# Altium PCB buck3.PcbDoc
Units mil, origin at the board's own origin, x right, y up, seen from the top; angles counter-clockwise.
Board outline 1968.5 x 984.25 mil, 4 copper layers (Top Layer, Signal Layer 1, Signal Layer 2, Bottom Layer), stack 61.811 mil thick; 31 components, 21 nets, 104 pads, 114 vias.
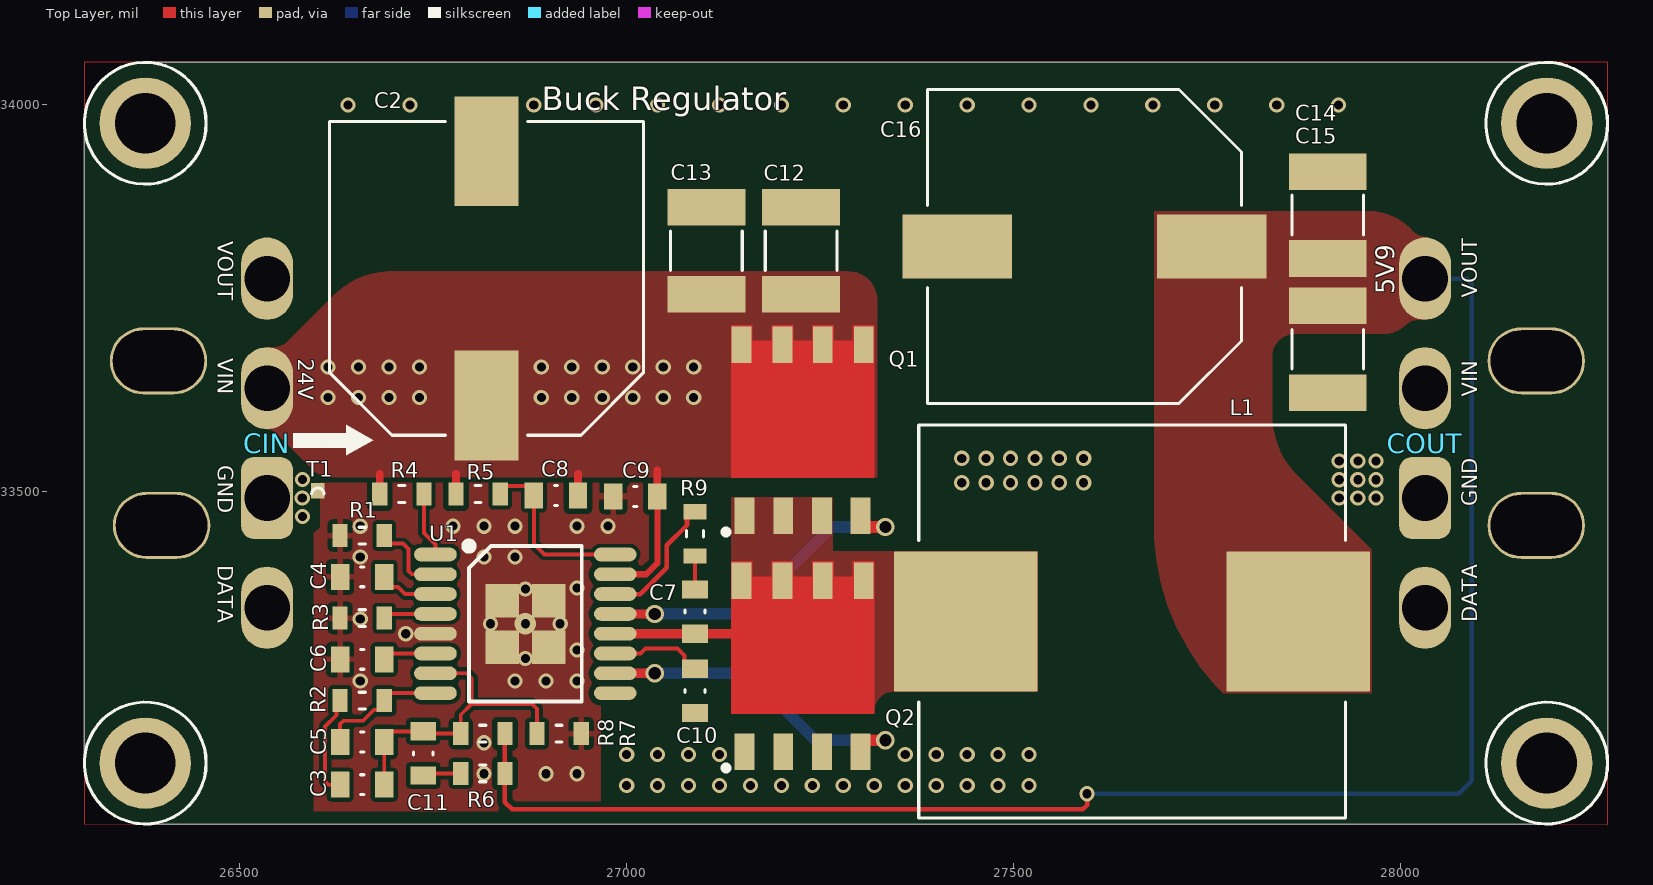
[diagram p0: Top Layer view]
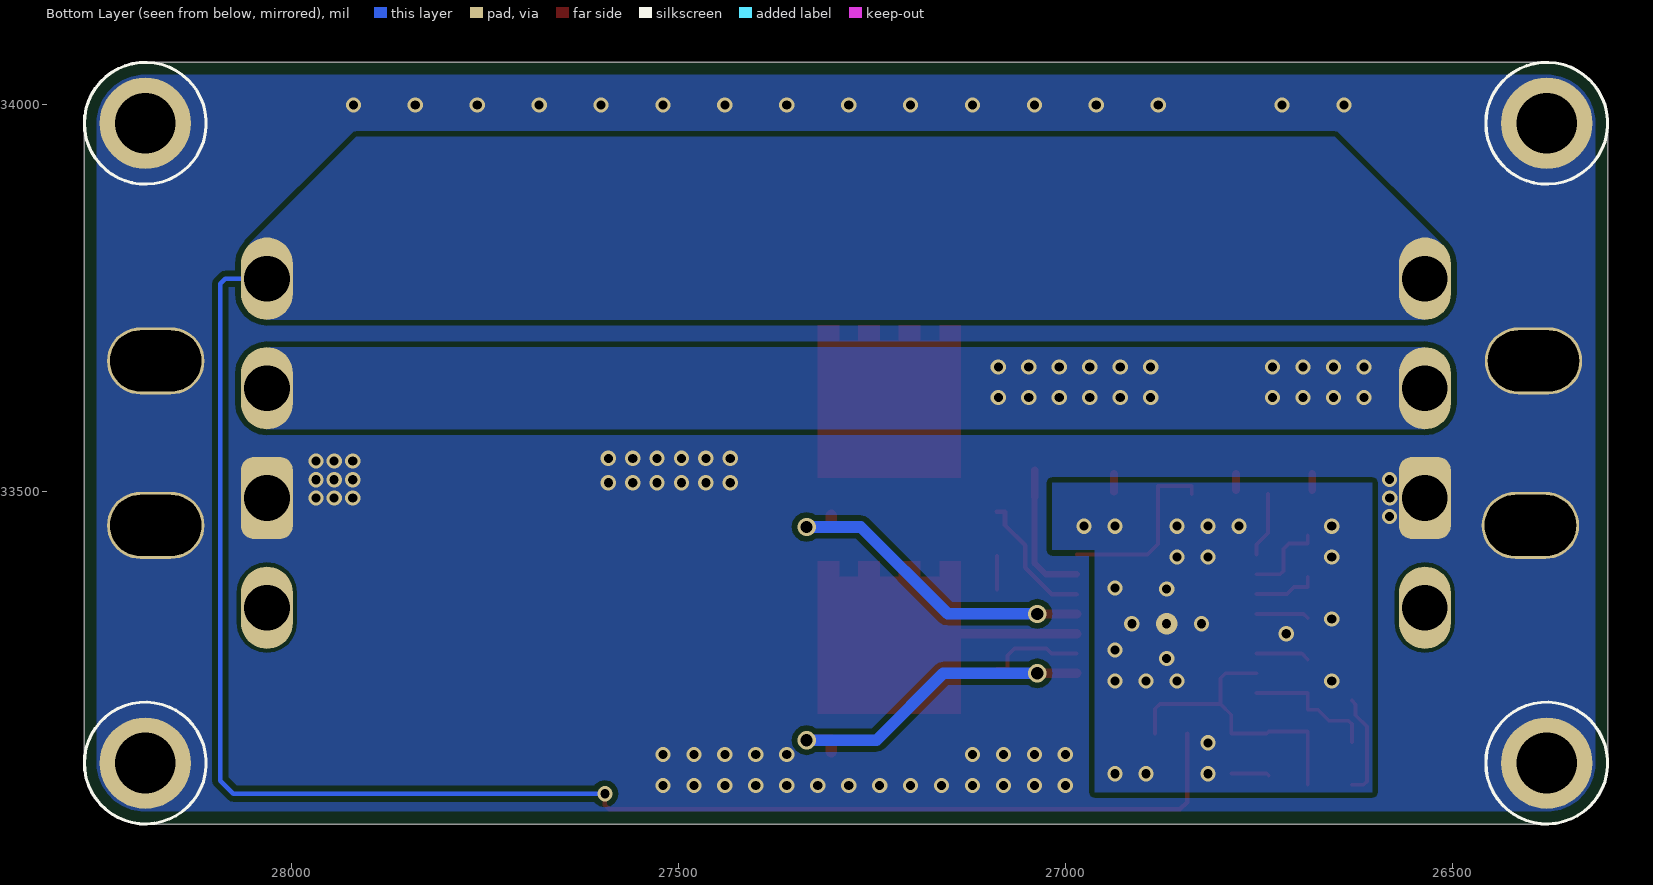
[diagram p1: Bottom Layer view, seen from below]
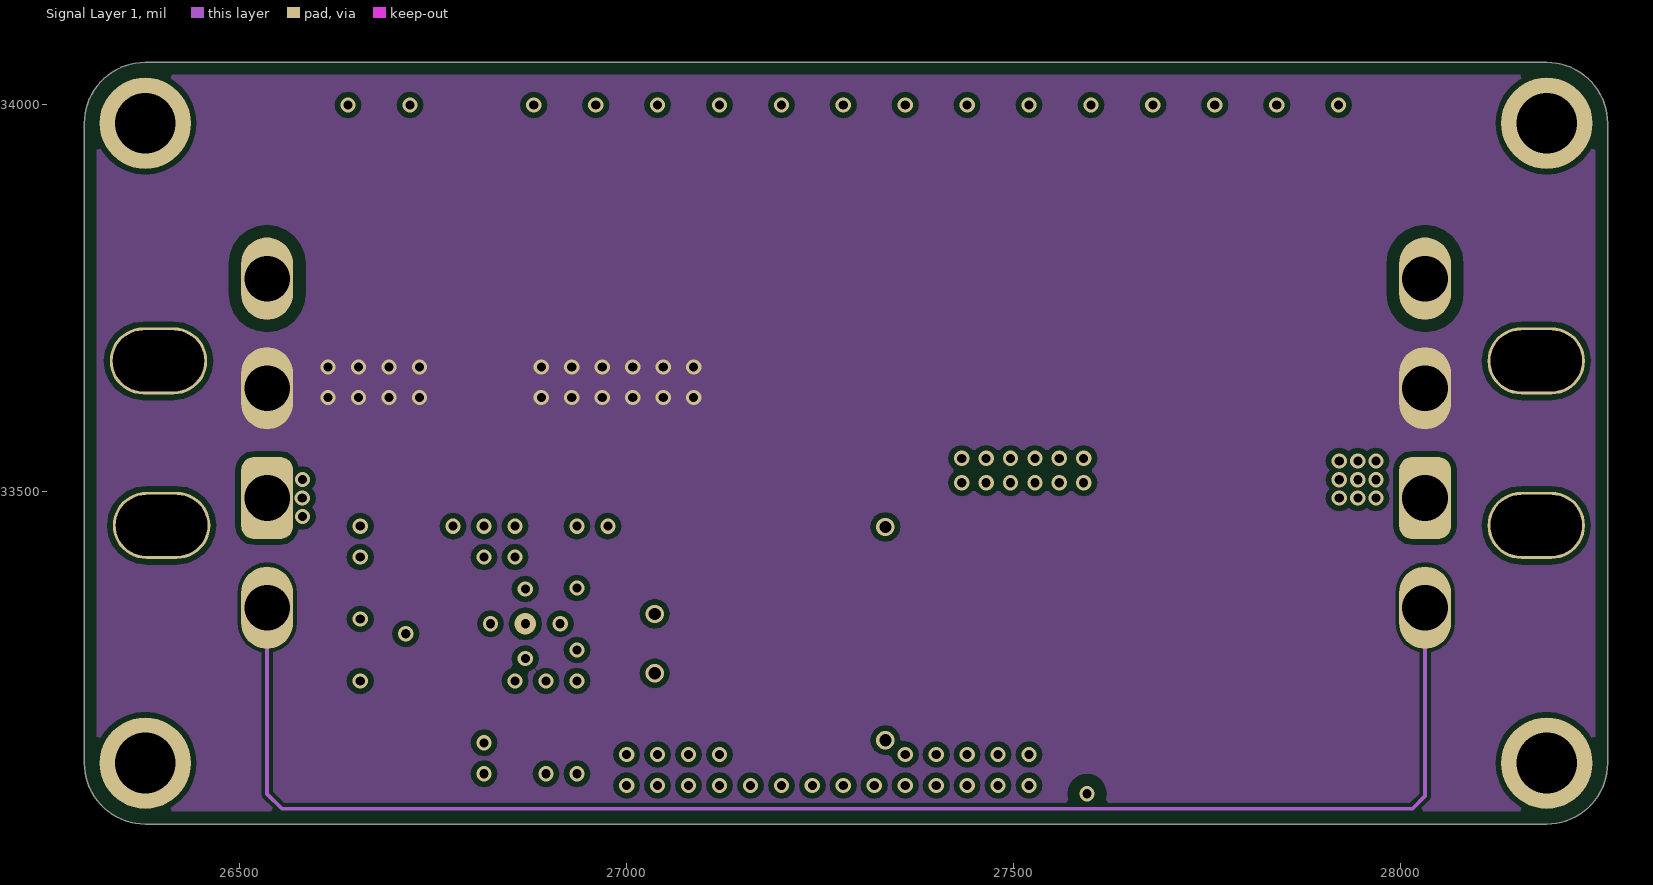
[diagram p2: Signal Layer 1]
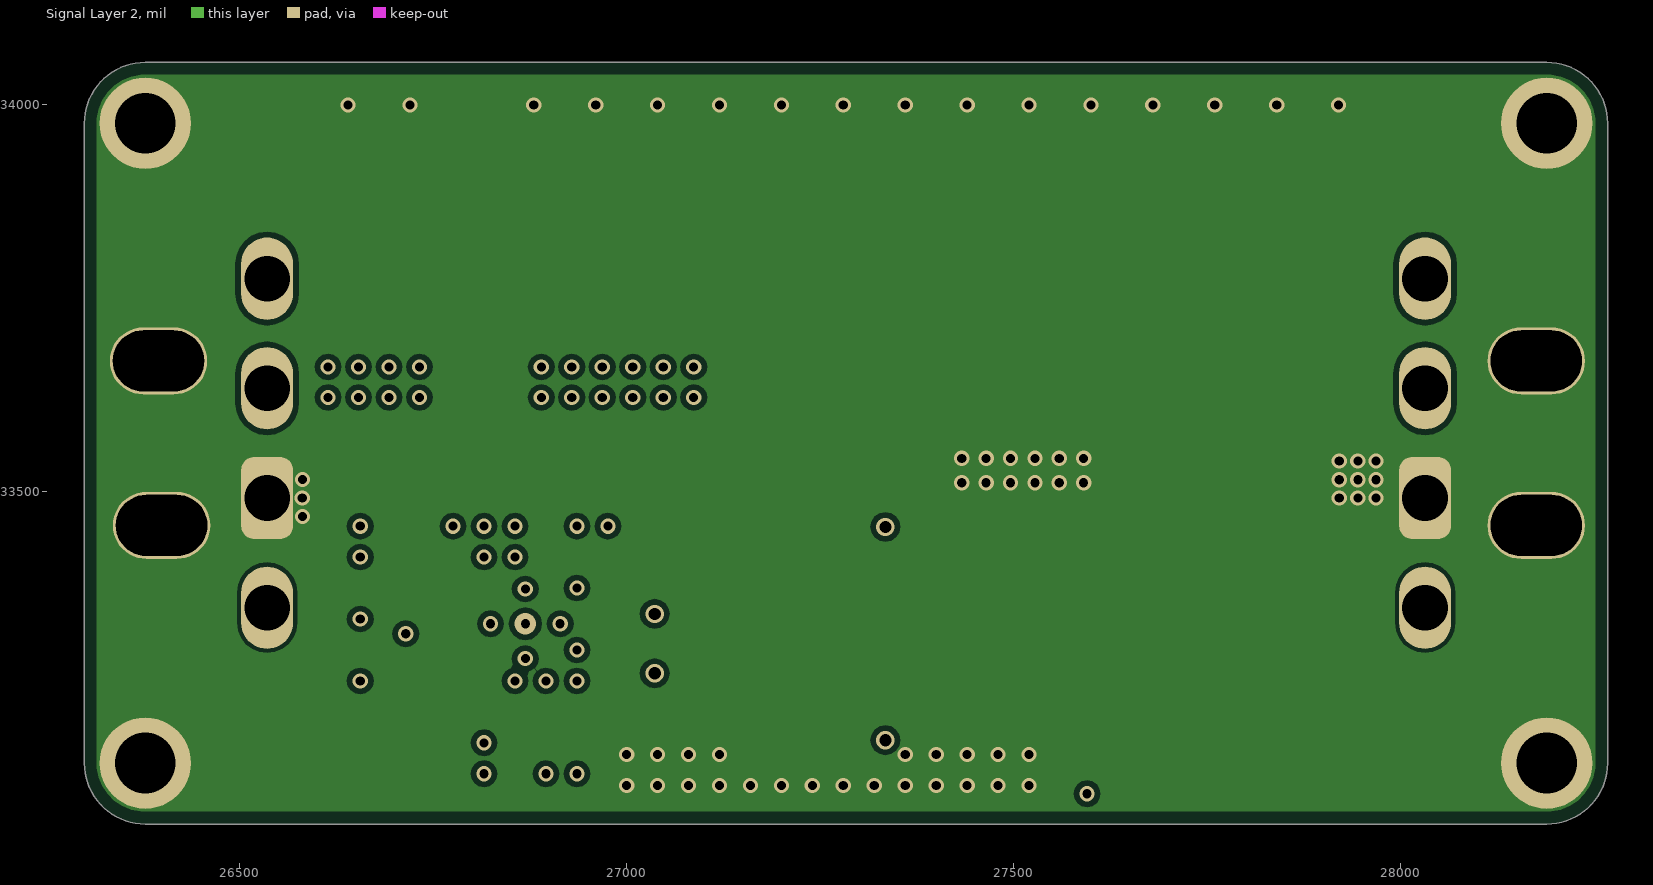
[diagram p3: Signal Layer 2]
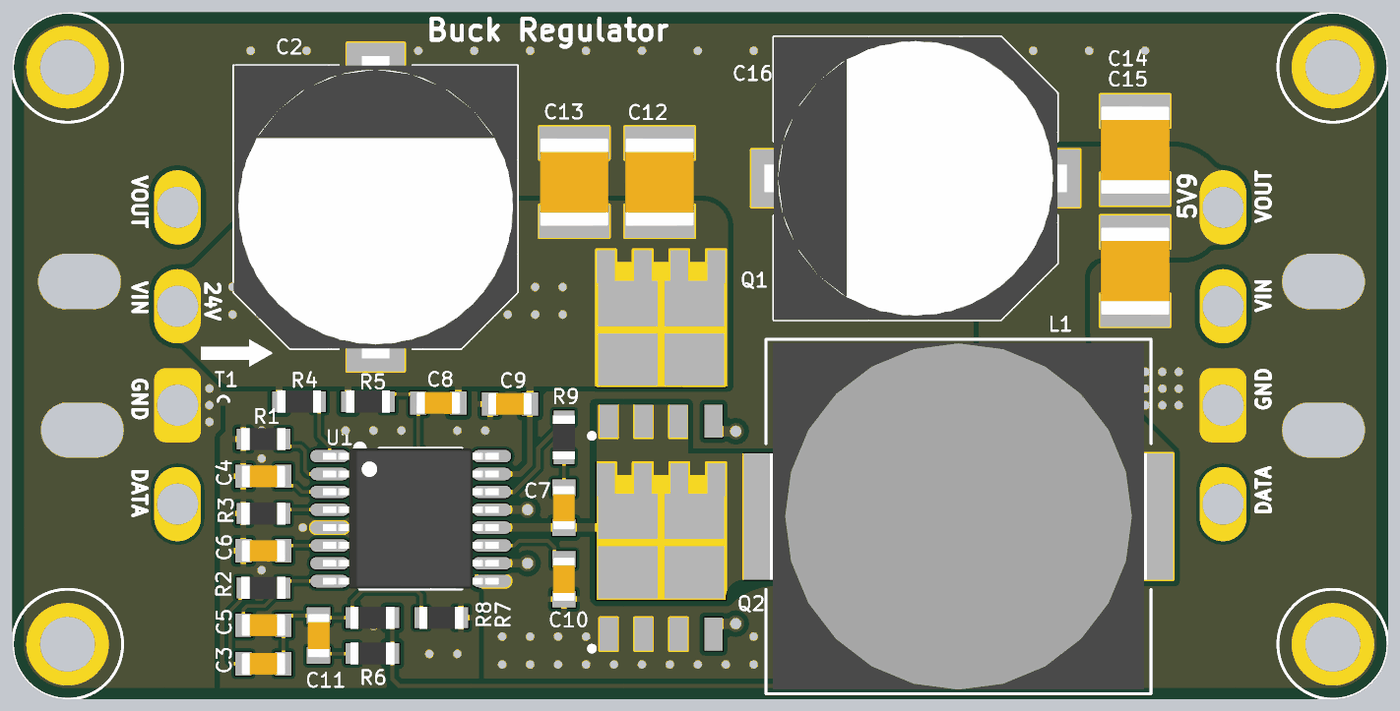
[diagram p4: 3D render of the assembled board from above, using the file's embedded part models]

## Layer stack, top to bottom
Top Solder: solder mask 0.4921, Solder Resist, Dk 3.5
Top Layer: signal copper 1.378
Dielectric Top: core 3.937, FR-4, Dk 4.05
Signal Layer 1: signal copper 0.689
Dielectric MIddle: prepreg 49.8031, FR-4, Dk 4.8
Signal Layer 2: signal copper 0.689
Dielectric Bottom: core 3.937, FR-4, Dk 4.05
Bottom Layer: signal copper 1.378
Bottom Solder: solder mask 0.4921, Solder Resist, Dk 3.5

## Board outline
26299.21,33149.61 26299.21,33976.38 cw(c26377.95,33976.38) 26377.95,34055.12 28188.98,34055.12 cw(c28188.98,33976.38) 28267.72,33976.38 28267.72,33149.61 cw(c28188.98,33149.61) 28188.98,33070.87 26377.95,33070.87 cw(c26377.95,33149.61)

## Design rules (kind name [scope] priority, off if disabled: settings)
AssemblyTestPointUsage [All] p1: valid=2
AssemblyTestpoint [All] p1: testpointundercomponent=TRUE minsize=1 maxsize=1000 preferedsize=60 minholesize=0 maxholesize=1000 preferedholesize=32 testpointgrid=1 usegrid=FALSE gridtolerance=0.01 allowsidetop=TRUE allowsidebottom=TRUE
BoardOutlineClearance BoardOutlineClearance_SILK [OnLayer('Top Overlay') or OnLayer('Bottom Overlay')] p1: gap=0 ignorepadtopadclearanceinfootprint=FALSE
BoardOutlineClearance [All] p2: gap=16 ignorepadtopadclearanceinfootprint=FALSE
Clearance Clearance_GND_TIE [InComponentClass('gnd_ties')] p1: gap=0 ignorepadtopadclearanceinfootprint=FALSE
Clearance "Stitching GND" [IsStitchingVia and InNet('GND') vs (IsVia and (Not IsStitchingVia)) Or IsPad] p2: gap=5 ignorepadtopadclearanceinfootprint=FALSE except(0: Arc-Hole Track-Hole SMDPad-Hole THPad-Hole Via-Hole Fill-Hole Poly-Hole Region-Hole Text-Hole)
Clearance "Stitching SGND" [IsStitchingVia and InNet('SGND') vs (IsVia and (Not IsStitchingVia)) Or IsPad] p3: gap=5 ignorepadtopadclearanceinfootprint=FALSE except(0: Arc-Hole Track-Hole SMDPad-Hole THPad-Hole Via-Hole Fill-Hole Poly-Hole Region-Hole Text-Hole)
Clearance Clearance_VOUT_24V [InNet('24V') Or InNet('VOUT') vs InNet('24V') Or InNet('VOUT')] p4: gap=15.75 ignorepadtopadclearanceinfootprint=FALSE except(0: Arc-Hole Track-Hole SMDPad-Hole THPad-Hole Via-Hole Fill-Hole Poly-Hole Region-Hole Text-Hole)
Clearance Clearance_VCC_GND [InNet('SW') Or InNet('24V') Or InNet('VOUT') Or InNet('?DRV') Or InNet('GND') Or InNet('SGND') vs InNet('SW') Or InNet('GND') Or InNet('SGND') Or InNet('24V') Or InNet('VOUT') Or InNet('?DRV')] p5: gap=7.09 ignorepadtopadclearanceinfootprint=FALSE except(0: Arc-Hole Track-Hole SMDPad-Hole THPad-Hole Via-Hole Fill-Hole Poly-Hole Region-Hole Text-Hole)
Clearance Clearance_DRV_SW [InNet('HDRV') Or InNet('LDRV') Or InNet('SW') vs InNet('HDRV') Or InNet('LDRV') Or InNet('SW')] p6: gap=10 ignorepadtopadclearanceinfootprint=FALSE except(0: Arc-Hole Track-Hole SMDPad-Hole THPad-Hole Via-Hole Fill-Hole Poly-Hole Region-Hole Text-Hole; 5: Arc-SMDPad Arc-THPad Track-SMDPad Track-THPad Track-Via SMDPad-SMDPad SMDPad-THPad SMDPad-Via SMDPad-Fill SMDPad-Poly SMDPad-Region SMDPad-Text THPad-THPad THPad-Via THPad-Fill THPad-Poly THPad-Region THPad-Text)
Clearance [All] p7: gap=5 ignorepadtopadclearanceinfootprint=FALSE except(0: Arc-Hole Track-Hole SMDPad-Hole THPad-Hole Via-Hole Fill-Hole Poly-Hole Region-Hole Text-Hole)
ComponentClearance [All] p1: gap=10 collisioncheckmode=3 verticalgap=100000 showdistances=FALSE
FabricationTestPointUsage [All] p1: valid=2 allowmultiple=FALSE
FabricationTestpoint [All] p1: side=3 testpointundercomponent=TRUE minsize=1 maxsize=1000 preferedsize=60 minholesize=0 maxholesize=1000 preferedholesize=32 testpointgrid=1 allowsidetop=TRUE allowsidebottom=TRUE usegrid=FALSE gridtolerance=0.01
HoleSize [All] p1: absolutevalues=TRUE maxlimit=118.11 minlimit=11.81 maxpercent=80.000 minpercent=20.000
MinimumAnnularRing [All] p1: minimumring=3
MinimumSolderMaskSliver [All] p1: minsoldermaskwidth=2
PlaneClearance [All] p1: clearance=10
PlaneConnect [All] p1: planeconnectstyle=Direct reliefexpansion=20 reliefentries=4 reliefconductorwidth=10 reliefairgap=10
PolygonConnect PolygonConnect_GND_STITCH [All vs (PadViaLibraryTemplate='GND_STITCH') Or InComponentClass('caps') Or InPadClass('mount_pads') Or IsTestpoint Or (IsVia and InComponent('U1'))] p1: connectstyle=Direct reliefconductorwidth=10 reliefentries=4 polygonreliefangle="90 Angle" airgapwidth=10
PolygonConnect PolygonConnect_GND_TIE [InComponentClass('gnd_ties')] p2: connectstyle=Direct reliefconductorwidth=8 reliefentries=4 polygonreliefangle="90 Angle" airgapwidth=6
PolygonConnect [All] p3: connectstyle=Relief reliefconductorwidth=8 reliefentries=4 polygonreliefangle="90 Angle" airgapwidth=6
RoutingVias [All] p1: holewidth=11.81 width=19.68 viastyle="Through Hole" minholewidth=11.81 minwidth=19.68 maxholewidth=39.37 maxwidth=39.37 viatemplateguid#1={BAA0EB76-4A78-4CE7-A276-326FA7DB2DC2} viatemplateguid#2={94253A7A-6B9A-4D54-9AA5-C9B8767EAE1F} viatemplateguid#3={C367774C-4605-47A4-9AB2-15C955A3533B} viatemplateguid#4={F74689E1-A418-4912-85DE-EF69A89A6256} viatemplateguid#5={CFB45FA9-C63B-4574-8658-0FA445F6A7ED} viatemplateguid#6={6DAC4434-ACAF-4762-9C78-70CE4687DF30} viatemplatename#1=GND_STITCH viatemplatename#2=v50h30m0mx0 viatemplatename#3=v60h40m0mx0 viatemplatename#4=v70h30m0mx0 viatemplatename#5=v50h30mx0 viatemplatename#6=v100h30m0mx0
ShortCircuit [InComponentClass('gnd_ties')] p1: allowed=TRUE
SilkToSilkClearance [All] p1: silktosilkclearance=0
SilkToSolderMaskClearance [IsPad] p1: minsilkscreentomaskgap=0 clearancetoexposedcopper=TRUE
SolderMaskExpansion [All] p1: expansion=2 istentingtop=FALSE
Width [All] p1: maxlimit=50 minlimit=5 preferedwidth=5 minimp=50.000000 maximp=50.000000 favimp=50.000000
18 further rules are at their usual default settings.

## Classes and differential pairs
component class caps: C2 C12 C13 C14 C15 C16 CIN COUT L1 Q1 Q2
pad class mount_pads: Free-1 Free-TL U1-5 U1-9 U1-17
component class gnd_ties: T1

## Components (designator, comment, footprint, x,y, rotation, side; value= is the part's Value field where it differs from the comment)
C2 "470uF" CAPAE110103X125L 26818.9,33776 r270 top
C3 "220pF" "CAPC 0603 1608X05L" 26658.3,33121.66 r0 top
C4 "100nF" "CAPC 0603 1608X05L" 26658.3,33390.21 r0 top
C5 "12pF" "CAPC 0603 1608X05L" 26658.3,33176.94 r0 top
C6 "3.3nF" "CAPC 0603 1608X05L" 26658.3,33283.58 r0 top
C7 "100nF" "CAPC 0603 1608X05L" 27088.44,33345.32 r90 top
C8 "100pF" "CAPC 0603 1608X05L" 26908.62,33495.29 r0 top
C9 "1uF" "CAPC 0603 1608X05L" 27011.15,33494 r0 top
C10 "1uF" "CAPC 0603 1608X05L" 27088.44,33242.79 r90 top
C11 "120pF" "CAPC 0603 1608X05L" 26737.21,33162.08 r90 top
C12 "22uF" "CAPC 1210" 27225.39,33811.75 r270 top
C13 "22uF" "CAPC 1210" 27103.18,33811.75 r270 top
C14 "22uF" "CAPC 1210" 27905.94,33857.74 r270 top
C15 "22uF" "CAPC 1210" 27905.94,33684.29 r90 top
C16 "220uF" CAPAE110103X125L 27591.76,33817.16 r0 top
CIN "CON2" CON2 26535.43,33562.99 r270 top
COUT "CON2" CON2 28031.77,33562.99 r270 top
L1 "Inductor" INDP135126X40L 27653.1,33332.68 r0 top
Q1 "Infineon BSC093N04LSGATMA1" INF-PG-TDSON-8-1_V 27227.39,33580.25 r90 top
Q2 "Infineon BSC093N04LSGATMA1" INF-PG-TDSON-8-1_V 27227.39,33275.28 r90 top
R1 "100K" "RESC 0603 1608X05L" 26658.3,33443.53 r0 top
R2 "64.9k" "RESC 0603 1608X05L" 26658.3,33230.26 r0 top
R3 "1K" "RESC 0603 1608X05L" 26658.3,33336.89 r0 top
R4 "57.6K" "RESC 0603 1608X05L" 26709.47,33497.26 r0 top
R5 "3.3k" "RESC 0603 1608X05L" 26808.06,33497.26 r0 top
R6 "5.9k" "RESC 0603 1608X05L" 26814.14,33136.32 r0 top
R7 "16K" "RESC 0603 1608X05L" 26912.74,33187.67 r180 top
R8 "110K" "RESC 0603 1608X05L" 26814.14,33187.67 r0 top
R9 "2r0" "RESC 0603 1608X05L" 27088.44,33445.88 r270 top
T1 "GND_TIE" GND_TIE 26600.89,33501.57 r180 top net-tie
U1 "TPS40057" TSOP65P640X120_HS-17N 26869.09,33329.57 r270 top

## Footprints (in the part's own frame and the unit in brackets; to place one, negate y for a bottom-side part, rotate by r counter-clockwise, add the part's x,y. Pads: shape width x height; smd on the part's side, far side on the other; paste and mask are expansions set on the pad)
CAPAE110103X125L [mm] "Aluminum Electrolytic Capacitor, Body 10.30x10.30x12.50mm, IPC High Density"
  rrect1% 3.6x2.1 smd: 1(4.175,0) 2(-4.175,0)
  silkscreen extent -5.15,-5.15 5.15,5.15, body extent -5.5,-5.15 5.5,5.15, height 12.5
"CAPC 0603 1608X05L" [mm]
  rrect1% 0.6x0.85 smd: 1(-0.725,0) 2(0.725,0)
  silkscreen extent -0.05,-0.33 0.05,0.33, body extent -0.8,-0.4 0.8,0.4, height 0.45
"CAPC 1210" [mm] "1210"
  rrect1% 1.2x2.55 smd: 1(-1.425,0) 2(1.425,0)
  silkscreen extent -0.65,-1.17 0.65,1.18, body extent -1.6,-1.25 1.6,1.25, height 1.7
CON2 [mm]
  oval 2.7x1.7 hole 1.5 paste+0 mask+0: 1(-5.4,0) 2(-1.8,0) 4(5.4,0)
  rrect50% 2.7x1.7 hole 1.5 paste+0 mask+0: 3(1.8,0)
GND_TIE [mil]
  rrect1% 10x20 smd paste-787.4 mask+0: 1(-3.94,0)
  rrect1% 10x20 smd paste-787.4 mask+2: 2(3.94,0)
INDP135126X40L [mm] "Precision Wire Wound Inductor, 2-Leads, Body 13.50x12.60mm, IPC High Density"
  rrect1% 4.7x4.6 smd: 1(-5.458,0) 2(5.458,0)
  silkscreen extent -7,-6.45 7,6.45, body extent -6.85,-6.3 6.85,6.3, height 4.1
INF-PG-TDSON-8-1_V [mm]
  rrect1% 1.2x0.65 smd: 1(-2.825,1.905) 2(-2.825,0.635) 3(-2.825,-0.635) 4(-2.825,-1.905) 5(2.794,-2.007) 6(2.794,-0.66) 7(2.794,0.66) 8(2.794,2.007)
  Top Layer region: 2.925,-0.315 2.925,-1.015 3.425,-1.015 3.425,-0.315
  Top Layer region: 2.925,1.015 2.925,0.315 3.425,0.315 3.425,1.015
  Top Layer region: 2.925,-1.65 2.925,-2.35 3.425,-2.35 3.425,-1.65
  Top Layer region: 2.925,2.35 2.925,1.65 3.425,1.65 3.425,2.35
  Top Layer region: 2.925,2.35 -1.575,2.35 -1.575,-2.35 2.925,-2.35
  silkscreen extent -3.4,2.46 -3.3,2.57, body extent -3.08,-2.58 3.08,2.58, height 1
"RESC 0603 1608X05L" [mm]
  rrect1% 0.5x0.75 smd: 1(-0.725,0) 2(0.725,0)
  silkscreen extent -0.1,-0.28 0.1,0.28, body extent -0.8,-0.4 0.8,0.4, height 0.45
TSOP65P640X120_HS-17N [mm]
  oval 0.45x1.4 smd: 1(-2.275,-2.95) 2(-1.625,-2.95) 3(-0.975,-2.95) 4(-0.325,-2.95) 5(0.325,-2.95) 6(0.975,-2.95) 7(1.625,-2.95) 8(2.275,-2.95) 9(2.275,2.95) 10(1.625,2.95) 11(0.975,2.95) 12(0.325,2.95) 13(-0.325,2.95) 14(-0.975,2.95) 15(-1.625,2.95) 16(-2.275,2.95)
  rrect1% 1.1x1.1 smd paste+0 mask+0: 17(-0.762,0.762) 17(-0.762,-0.762) 17(0.762,0.762) 17(0.762,-0.762)
  silkscreen extent -2.67,-1.97 2.55,1.85, body extent -2.55,-3.2 2.55,3.2, height 1.2

## Part data
C2 C16: library part "E CAP", "Capacitor"
C3 C4 C5 C6 C7 C8 C9 C10 C11 C12 C13 C14 C15: library part Cap, "Capacitor"
Q1 Q2: library part MOSFET-N, "N Channel MOSFET"
R1 R2 R3 R4 R5 R6 R7 R8 R9: library part Res2, "Resistor"
U1: "Buck Controller"

## Free pads (board coordinates)
  oval 125.98x86.61 hole 78.74 slot 118.11 at 0 deg mask+0: 1(26395.06,33669.29) 1(26399.06,33456.69) 1(28175.44,33456.69) 1(28175.44,33669.29)
  round 118.11 hole 78.74 paste+0 mask+0: TL(26377.95,33976.38) TL(26377.95,33149.61) TL(28188.98,33976.38) TL(28188.98,33149.61)

## Via types
v1: diameter 19.68, hole 11.81, Top Layer to Bottom Layer, tented both sides, 109 vias
v2: diameter 23.62, hole 15.75, Top Layer to Bottom Layer, tented both sides, 4 vias
v3: diameter 27.56, hole 11.81, Top Layer to Bottom Layer, tented both sides, 1 vias

## Nets (pads, with @x,y where several pads share a name; then routed paths per layer and width w, separated by ;. In a path a pad name is that pad's centre, name@x,y a point inside that pad or via, vN(x,y) a via of type N, cw(c..) or ccw(c..) an arc to the next point about the centre after c; other vN are vias at no path point)
24V: C2.1 C8.2 C9.2 C12.2 C13.2 CIN.2 COUT.2 Q1.5 Q1.6 Q1.7 Q1.8 R4.1 R5.1 U1.15 | length 246.4
  Top Layer w8: U1.15 27025.44,33393.55 27039.7,33407.81 C9.2
  Top Layer w10: R4.1@26680.93,33502.18 26680.93,33523.62 ; R5.1@26779.52,33502.18 26779.52,33523.62 ; C8.2@26937.17,33500.21 26937.17,33523.62 ; C9.2 27039.7,33527.56
  other v1: 26614.19,33622.07 26653.56,33622.07 26692.93,33622.07 26732.3,33622.07 26889.78,33622.07 26929.15,33622.07 26968.52,33622.07 27007.89,33622.07 27047.26,33622.07 27086.63,33622.07 26614.19,33661.44 26653.56,33661.44 26692.93,33661.44 26732.3,33661.44 26889.78,33661.44 26929.15,33661.44 26968.52,33661.44 27007.89,33661.44 27047.26,33661.44 27086.63,33661.44
DATA: CIN.4 COUT.4 | length 1995.2
  Signal Layer 1 w5: CIN.4 26535.43,33109.57 26554.45,33090.55 28015.28,33090.55 28031.77,33107.04 COUT.4
FB: C3.2 C5.2 C11.2 R7.2 R8.1 U1.7 | length 415
  Top Layer w5: C3.2 C5.2 26686.84,33190.62 C11.2 26740.16,33187.67 R8.1 26785.6,33212.04 26799.7,33226.14 ; U1.7 26793.31,33265.59 26799.7,33259.2 26799.7,33226.14 ; R7.2 26884.19,33219.87 26877.92,33226.14 26799.7,33226.14
GND: C2.2 C10.1 C12.1 C13.1 C14.1 C15.1 C16.2 CIN.3 COUT.3 pad.1 pad.TL Q2.1 Q2.2 Q2.3 T1.2 U1.9
  other v1: 27000,33120.63 27040,33120.63 27080,33120.63 27120,33120.63 27160,33120.63 27200,33120.63 27240,33120.63 27280,33120.63 27320,33120.63 27360,33120.63 27400,33120.63 27440,33120.63 27480,33120.63 27520,33120.63 27000,33160.63 27040,33160.63 27080,33160.63 27120,33160.63 27360,33160.63 27400,33160.63 27440,33160.63 27480,33160.63 27520,33160.63 26581,33468.19 26580.88,33492.13 27920.9,33492.07 27944.88,33492.07 27968.23,33492.07 27433.1,33511.85 27464.6,33511.85 27496.1,33511.85 27527.59,33511.85 27559.09,33511.85 27590.58,33511.85 26581,33516 27920.9,33515.75 27944.88,33515.75 27968.23,33515.75 27920.9,33539.95 27944.88,33539.95 27968.23,33539.95 27433.1,33543.35 27464.6,33543.35 27496.1,33543.35 27527.59,33543.35 27559.09,33543.35 27590.58,33543.35 26640,34000 26720,34000 26880,34000 26960,34000 27040,34000 27120,34000 27200,34000 27280,34000 27360,34000 27440,34000 27520,34000 27600,34000 27680,34000 27760,34000 27840,34000 27920,34000
HDRV: Q1.4 U1.13 | length 442.6
  Top Layer w12: U1.13@26985.09,33342.37 U1.13 v2(27036.28,33342.37)
  Top Layer w15: Q1.4@27302.39,33469.58 Q1.4 27302.39,33454.72 v2(27334.33,33454.72)
  Bottom Layer w15: v2(27036.28,33342.37) 27152.17,33342.37 27264.53,33454.72 v2(27334.33,33454.72)
LDRV: Q2.4 U1.10 | length 431.9
  Top Layer w12: U1.10 v2(27036.28,33265.59)
  Top Layer w15: Q2.4 27302.39,33179.13 v2(27334.33,33179.13)
  Bottom Layer w15: v2(27036.28,33265.59) 27157.63,33265.59 27244.09,33179.13 v2(27334.33,33179.13)
NetC3_1: C3.1 R2.1 | length 133.5
  Top Layer w5: C3.1 26614.58,33121.66 26610.44,33125.79 26610.44,33196.79 26625,33211.35 26625,33225.51 R2.1
NetC4_2: C4.2 U1.3 | length 83.1
  Top Layer w5: C4.2 26686.84,33376.97 26704.72,33376.97 26713.74,33367.96 U1.3
NetC5_1: C5.1 R2.2 U1.8 | length 175.5
  Top Layer w5: C5.1 26629.75,33200.2 26633.9,33204.35 26659.46,33204.35 26673.61,33218.5 26686.84,33218.5 R2.2 26686.84,33240 U1.8
NetC6_2: C6.2 U1.6 | length 69.3
  Top Layer w5: C6.2 26694.45,33291.18 U1.6
NetC7_2: C7.2 R9.2 | length 43.5
  Top Layer w5: C7.2 R9.2
NetC8_1: C8.1 R5.2 U1.16 | length 240
  Top Layer w5: R5.2 26836.6,33507.87 26880.08,33507.87 C8.1 26880.08,33432.84 26893.79,33419.14 U1.16
NetC10_2: C10.2 U1.11 | length 126.9
  Top Layer w5: U1.11 27017.75,33291.18 27024.3,33297.74 27065.7,33297.74 27075,33288.44 27075,33271.33 C10.2
NetC11_1: C11.1 R6.1 | length 49.5
  Top Layer w5: C11.1 26739.99,33136.32 R6.1
NetR1_2: R1.2 U1.2 | length 109.4
  Top Layer w5: R1.2 26686.84,33433.27 26710.79,33433.27 26718.02,33426.04 26717.89,33425.91 26717.89,33398.02 26722.37,33393.55 U1.2
NetR3_2: R3.2 U1.4 | length 68.4
  Top Layer w5: R3.2 26692.31,33342.37 U1.4
NetR4_2: R4.2 U1.1 | length 84.3
  Top Layer w5: R4.2 26738.01,33446.9 26752.81,33432.1 26752.81,33419.28 U1.1
NetR9_1: R9.1 U1.14 | length 174.3
  Top Layer w6: U1.14 27017.56,33367.96 27051.7,33402.09 27051.7,33430.87 27078,33457.18 27078,33474.42 R9.1
SGND: C4.1 C6.1 C9.1 R1.1 R3.1 R7.1 T1.1 U1.5 U1.17
  other v1: 26815.75,33135.75 26895.75,33135.75 26935.75,33135.75 26815.75,33175.75 26655.75,33255.75 26855.75,33255.75 26895.75,33255.75 26935.75,33255.75 26869.09,33284.57 26935.75,33295.75 26714.57,33316.78 26824.09,33329.57 26914.09,33329.57 26655.75,33335.75 26869.09,33374.57 26935.75,33375.75 26655.75,33415.75 26815.75,33415.75 26855.75,33415.75 26655.75,33455.75 26775.75,33455.75 26815.75,33455.75 26855.75,33455.75 26935.75,33455.75 26975.75,33455.75
  other v3: 26869.09,33329.57
SW: C7.1 L1.1 Q1.1 Q1.2 Q1.3 Q2.5 Q2.6 Q2.7 Q2.8 U1.12 | length 169.1
  Top Layer w12: U1.12 C7.1 27154.37,33316.78
VOUT: C14.2 C15.2 C16.1 CIN.1 COUT.1 L1.2 R6.2 R8.2 | length 2068.4
  Top Layer w6: R8.2 R6.2 26842.69,33099.24 26851.93,33090 27589.58,33090 27595,33095.42 v1@27595,33108
  Bottom Layer w6: v1(27595,33110) 28075,33110 28092,33127 28092,33769 28085.41,33775.59 COUT.1

## Polygon pours and split planes (outlines as drawn)
SW on Top Layer "SW_TOP" (solid, remove dead copper, pour order 49): 27134.87,33493 27266.04,33493 27266.04,33423.34 27531,33423.34 27531,33242 27345.52,33242 ccw(c27345.52,33216.22) 27319.91,33213.27 27134.87,33213.27
24V on Top Layer "24V_TOP" (solid, remove dead copper, pour order 46): 26535.43,33687 26535.43,33581 cw(c26535.43,33565.26) 26546.56,33576.39 26592.56,33530.39 ccw(c26620.57,33558.41) 26620.58,33518.79 27323.61,33518.79 27323.61,33747.61 ccw(c27286.22,33747.61) 27286.22,33785 26695.62,33785 ccw(c26695.62,33681.52) 26622.44,33754.69 26562.79,33695.03 cw(c26543.39,33714.42) 26543.39,33687
VOUT on Top Layer "VOUT_TOP" (solid, remove dead copper, pour order 50): 27682,33862.57 27682,33454.42 ccw(c27985.23,33454.42) 27770.82,33240 27962.56,33240 27962.56,33425.23 27867.12,33520.68 cw(c27947.07,33600.64) 27834,33600.64 27834,33675 cw(c27862.86,33675) 27862.86,33703.86 27976.84,33703.86 ccw(c27976.85,33748.16) 28008.17,33716.84 cw(c28020.63,33704.38) 28020.63,33722 28034.45,33722 28034.45,33829 cw(c28034.45,33854.53) 28016.4,33836.48 28011.81,33841.07 ccw(c27959.9,33789.17) 27959.9,33862.57
GND on Top Layer "GND_TOP" (solid, remove dead copper, shelved, pour order 52): 26299.21,34055.12 26299.21,33070.87 28267.72,33070.87 28267.72,34055.11
SGND on Top Layer "SGND_TOP" (solid, remove dead copper, pour order 48): 26604.16,33511.61 26604.16,33454.57 26596,33446.4 26596,33070.87 26966.54,33070.87 26966.54,33326.92 27033.86,33326.92 27033.86,33511.61
24V on Bottom Layer "24V_BOTTOM" (solid, remove dead copper, pour order 44): 26535.43,33686.99 26535.43,33581 28031.77,33581 28031.77,33687
VOUT on Bottom Layer "VOUT_BOTTOM" (solid, remove dead copper, pour order 45): 26651.67,33958.67 26514.2,33821.2 26535,33722.73 28031.18,33722.73 28054,33821.2 27916.54,33958.66
GND on Bottom Layer "24V_BOTTOM" (solid, remove dead copper, pour order 51): 26299.21,34055.12 28267.72,34055.12 28267.72,33070.87 26299.21,33070.87
SGND on Bottom Layer "SGND_BOTTOM" (solid, remove dead copper, pour order 47): 26603.35,33511.85 26603.35,33112 26962,33112 26962,33425 27017,33425 27017,33511.85
24V on Signal Layer 1 "24V_FILL" (solid, remove dead copper, pour order 54): 26299.21,34055.12 26299.21,33070.87 28267.72,33070.86 28267.72,34055.12
GND on Signal Layer 2 "GND_FILL" (solid, remove dead copper, pour order 56): 26299.21,34055.12 26299.21,33070.87 28267.72,33070.87 28267.72,34055.12

## Silkscreen, mask and mechanical layers (free items; w line width, h text height)
Top Overlay:
  circle w4: c26377.95,33976.38 r78.74
  circle w4: c28188.98,33976.38 r78.74
  circle w4: c28188.98,33149.61 r78.74
  circle w4: c26377.95,33149.61 r78.74
  region: 26568.93,33575.7 26568.93,33557 26637.83,33557 26637.83,33547.16 26672.28,33566.84 26637.83,33586.53 26637.83,33575.7
  lines w4: 26593,33497.58 cw(c26601,33497) 26609,33497.58
  text "Buck Regulator" at 26890,33993 h30
  text "VOUT" at 26471.41,33823.98 h20 r270
  text "5V9" at 27992.13,33755.33 h24 r90
  text "VOUT" at 28099.2,33750.67 h20 r90
  text "VIN" at 26471.41,33672.68 h20 r270
  text "24V" at 26575.79,33672.24 h20 r270
  text "VIN" at 28099.2,33622.7 h20 r90
  text "GND" at 26471.41,33534.72 h20 r270
  text "GND" at 28099.2,33481.4 h20 r90
  text "DATA" at 26471.41,33405.08 h20 r270
  text "DATA" at 28099.2,33331.77 h20 r90
Bottom Overlay:
  circle w4: c26377.95,33976.38 r78.74
  circle w4: c28188.98,33976.38 r78.74
  circle w4: c28188.98,33149.61 r78.74
  circle w4: c26377.95,33149.61 r78.74
Mechanical 2:
  the board outline again, w1

## Dimensions
28188.98,33976.38 to 28317,33976 on Mechanical 3
28175.44,33456.69 to 28175.44,33669.29 on Mechanical 3
26377.95,34055.12 to 26535.43,33070.87 on Mechanical 3
26299.21,33976.38 to 28267.72,33976.38 on Mechanical 3
26299.21,33976.38 to 26377.95,33976.38 on Mechanical 3
26377.95,34055.12 to 26377.95,33976.38 on Mechanical 3